# EAGLE board rev0.1 (EAGLE 8.3.1)
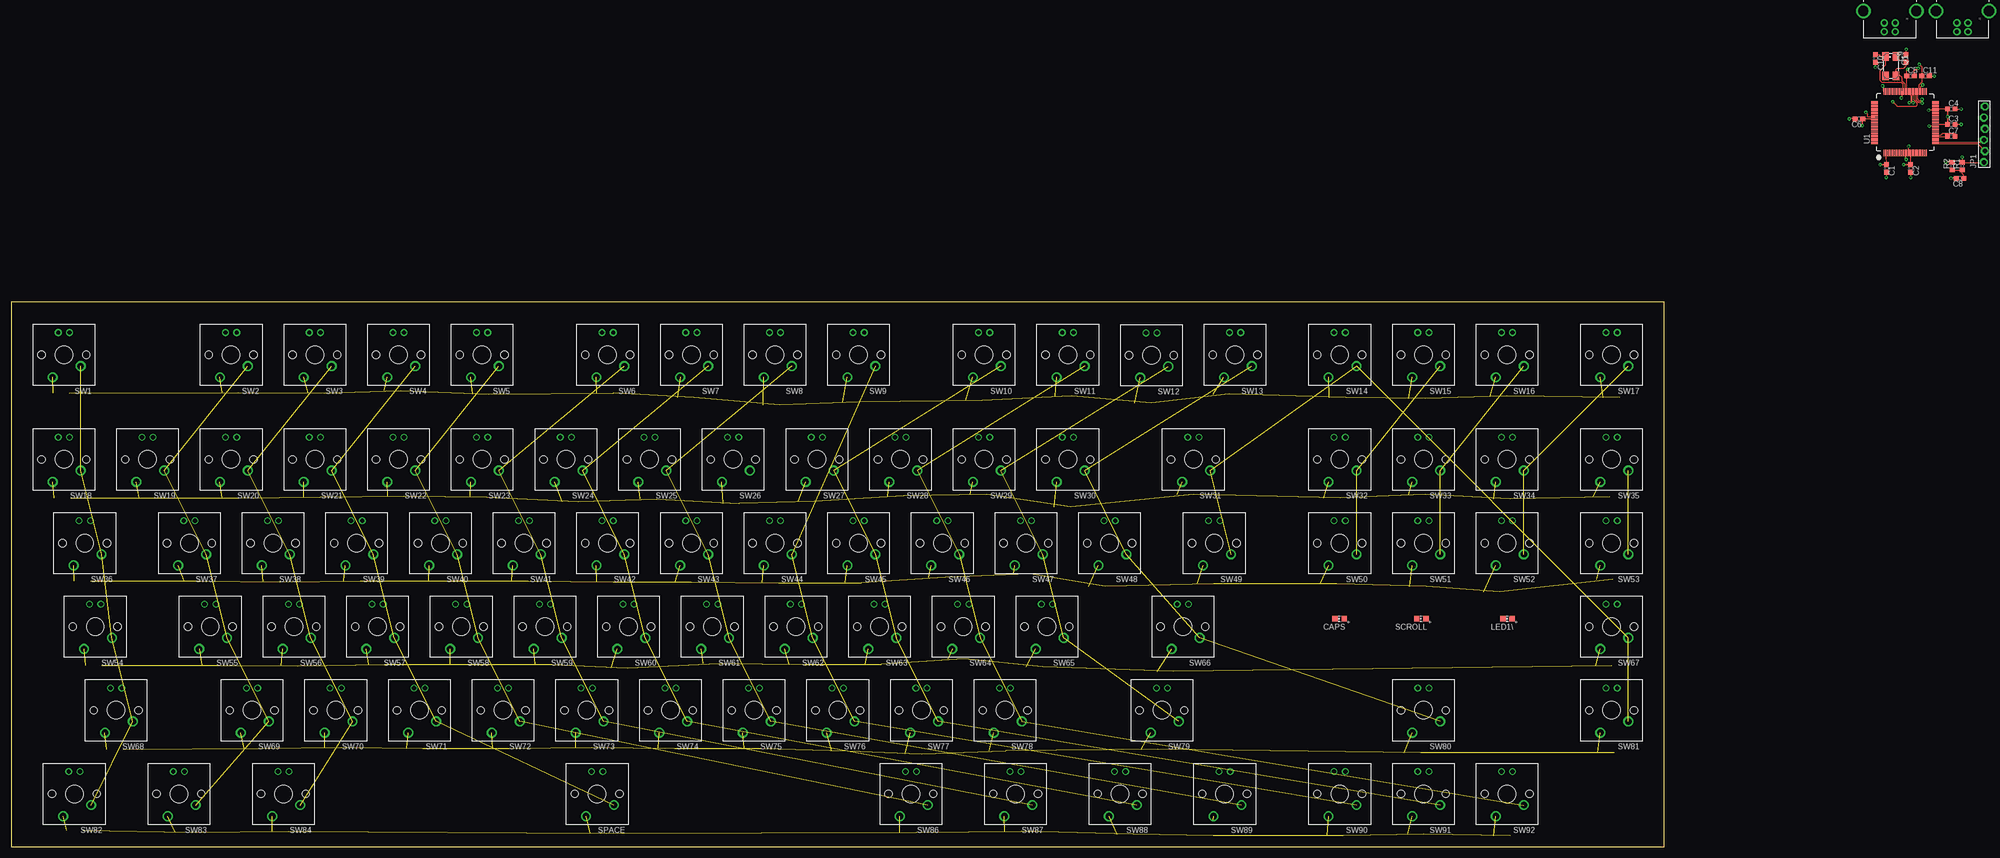
[diagram p0: board, top side]
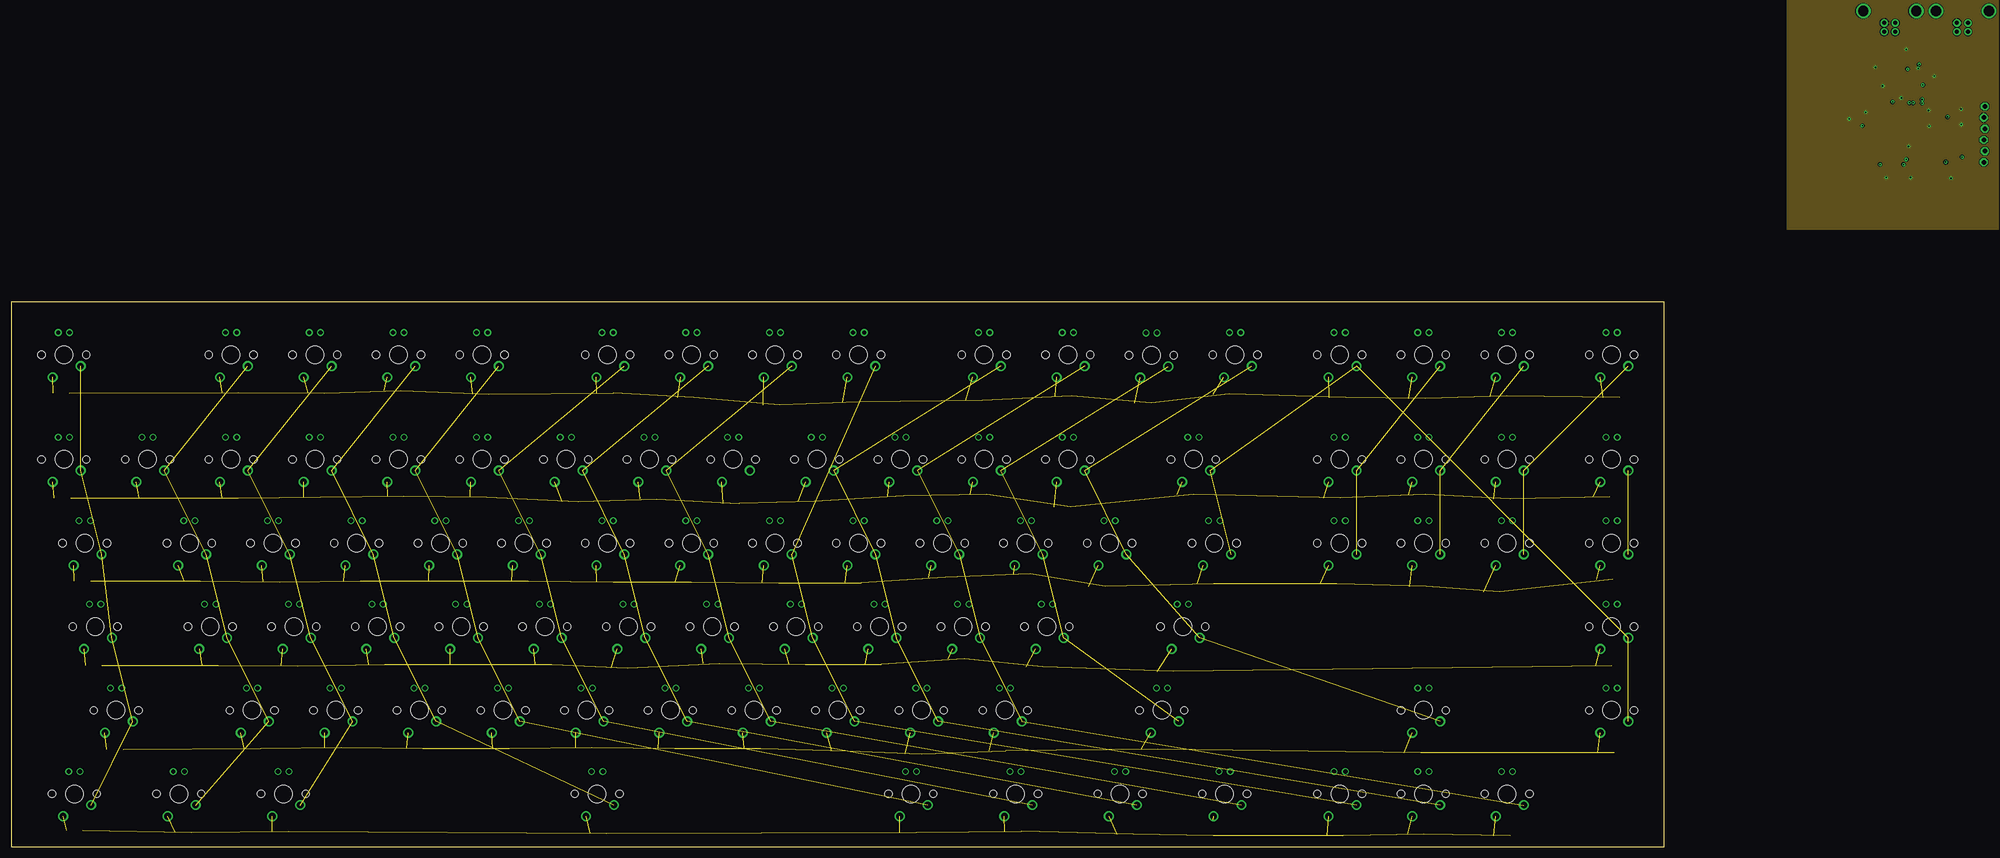
[diagram p1: board, inner layer GND]
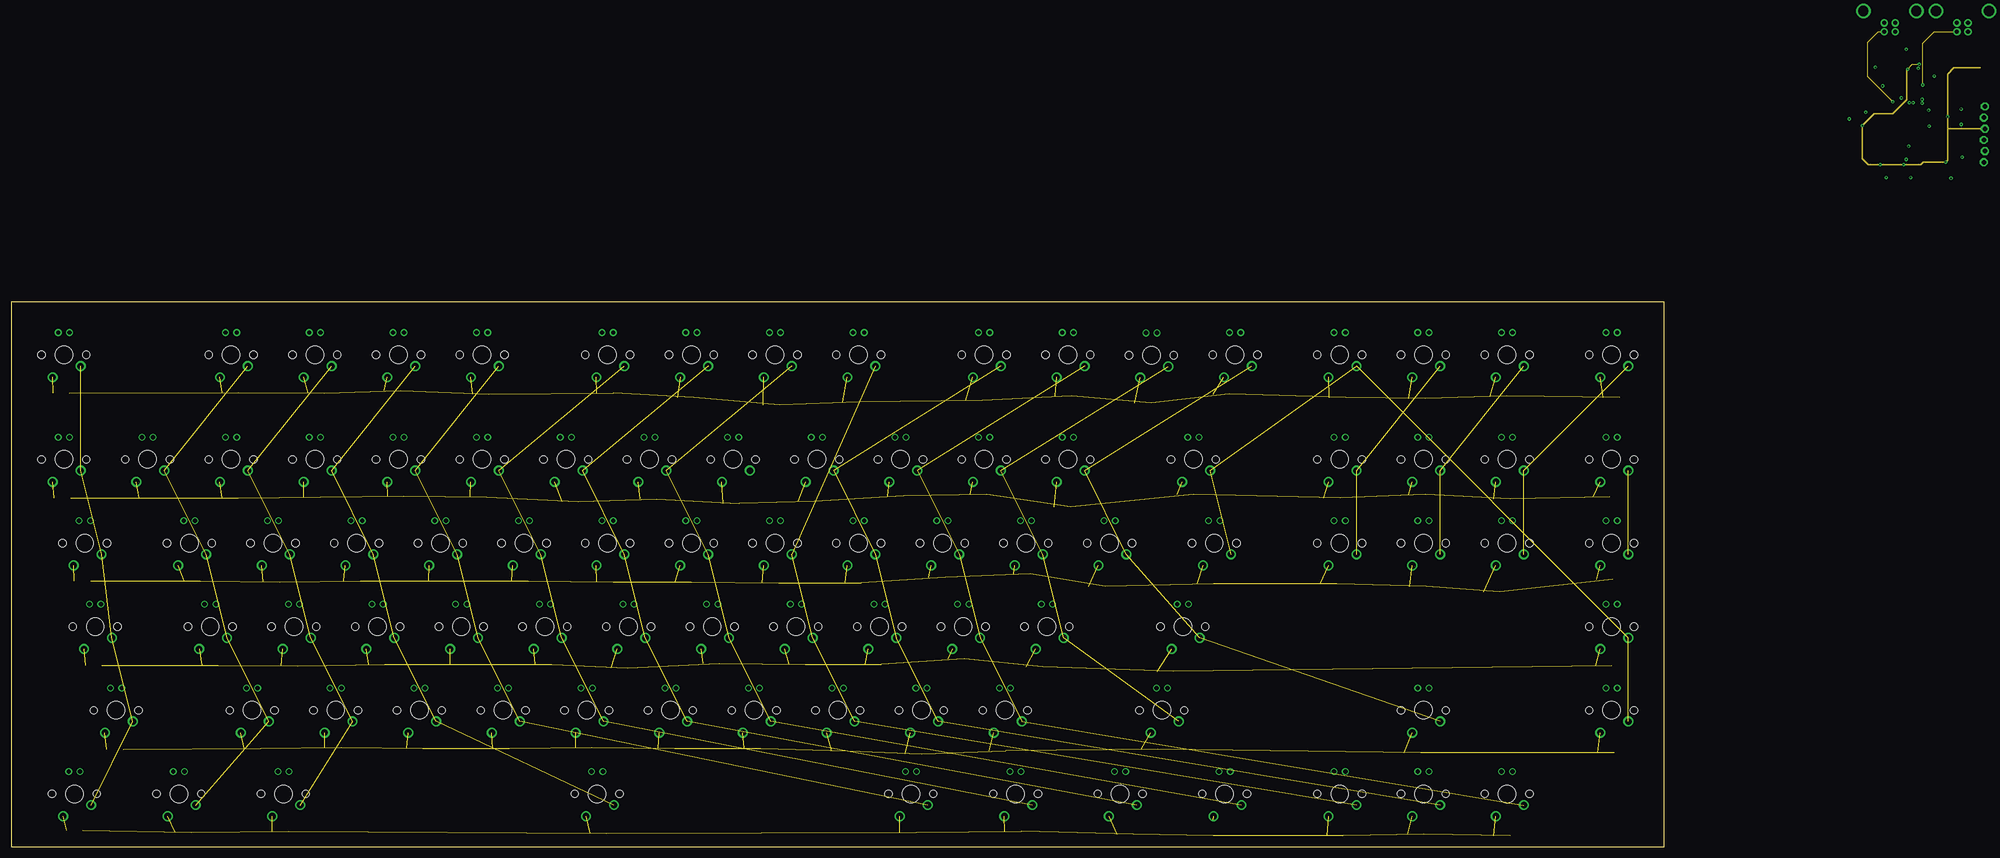
[diagram p2: board, inner layer SUPPLY]
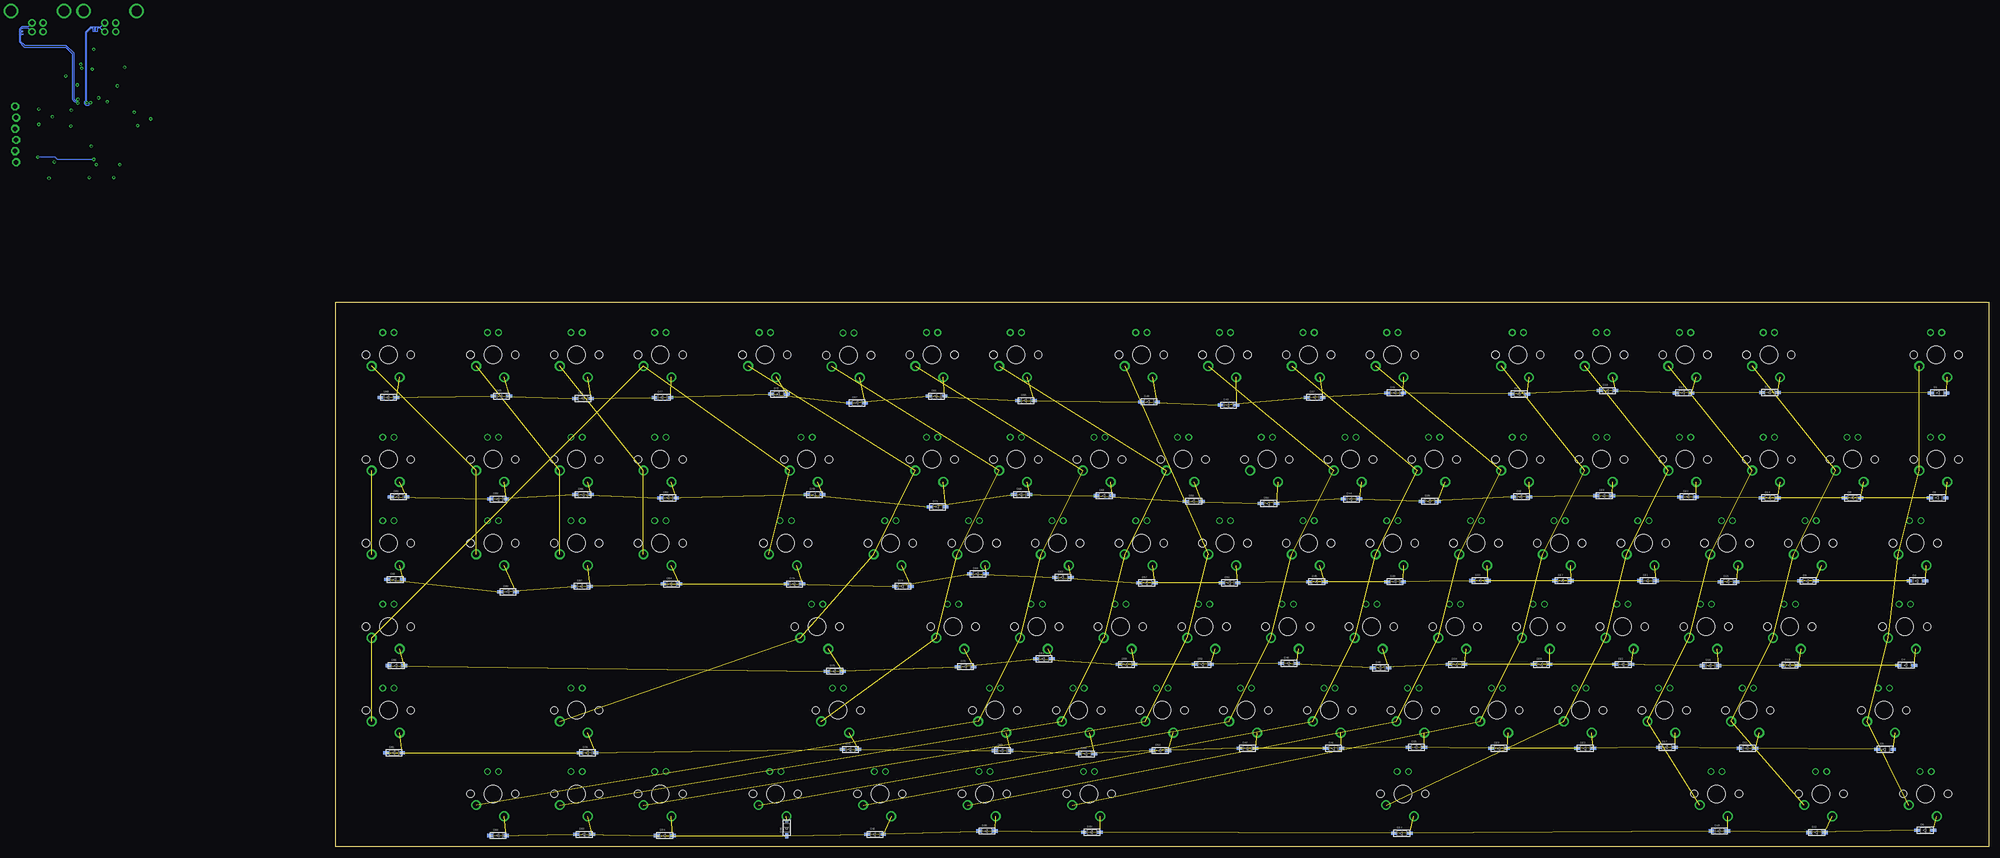
[diagram p3: board, bottom side, seen from below]

Size 375.5 x 123.75 mm. Coordinates in mm from the lower left corner, seen from the top.
Outline: 0,0 375.5,0 375.5,123.75 0,123.75 0,0
Copper layers (1*2*15*16): TOP 0.035mm / dielectric 0.33mm / GND 0.035mm / dielectric 0.8mm / SUPPLY 0.035mm / dielectric 0.33mm / BOTTOM 0.035mm
Design rules "alleybeachdrc4layer *": minimum track width 6mil, minimum drill 0.3mm, track to track 6mil, track to pad 6mil, pad to pad 6mil, via to via 6mil, smd to smd 6mil, copper to edge 10mil, drill to drill 0.3mm, minimum pad ring 10mil, minimum via ring 8mil, stop-mask expansion 5mil, vias tented up to drill 0.3mm, thermal gap 10mil

## Footprints (pad centres in the part's own frame; a part is rotated, then mirrored left to right if it is on the bottom)
C0603 = smd 1.1 x 1: 1 -0.85,0; 2 0.85,0
CHIP-LED0805 = smd 1.2 x 1.2: A 0,-1.05; C 0,1.05
SOD-123 = smd 1.2 x 0.7: A 1.85,0; C -1.85,0
USB-B-PTH = drill 0.914 pad 1.676: D+ 0,1.25; D- 1.981,1.25; GND 0,-1.25; VBUS 1.981,-1.25 | drill 2.286: S1 -2.718,-6.02; S2 -2.718,6.02
1X06-BIGLOCK = drill 1.016 pad 1.778 octagon: 1 -6.35,0.127; 2 -3.81,-0.127; 3 -1.27,0.127; 4 1.27,-0.127; 5 3.81,0.127; 6 6.35,-0.127
CTS406 = smd 1.9 x 1.4: 1 -2.2,-1.2; 2 2.2,-1.2; 3 2.2,1.2; 4 -2.2,1.2
R0603 = smd 1 x 1.1: 1 -0.85,0; 2 0.85,0
CHERRY_MX = drill 1.5: 1 -3.81,2.54; 2 2.54,5.08 | drill 1: A -1.27,-5.08; K 1.27,-5.08 | hole 4: 0,0 | hole 1.7: 5.08,0; -5.08,0
PIC32MK1024MCF100 = smd 1.5 x 0.2: 1 -6.95,4.8; 2 -6.95,4.4; 3 -6.95,4; 4 -6.95,3.6; 5 -6.95,3.2; 6 -6.95,2.8; 7 -6.95,2.4; 8 -6.95,2; 9 -6.95,1.6; 10 -6.95,1.2; 11 -6.95,0.8; 12 -6.95,0.4; 13 -6.95,0; 14 -6.95,-0.4; 15 -6.95,-0.8; 16 -6.95,-1.2; 17 -6.95,-1.6; 18 -6.95,-2; 19 -6.95,-2.4; 20 -6.95,-2.8; 21 -6.95,-3.2; 22 -6.95,-3.6; 23 -6.95,-4; 24 -6.95,-4.4; 25 -6.95,-4.8; 51 6.95,-4.8; 52 6.95,-4.4; 53 6.95,-4; 54 6.95,-3.6; 55 6.95,-3.2; 56 6.95,-2.8; 57 6.95,-2.4; 58 6.95,-2; 59 6.95,-1.6; 60 6.95,-1.2; 61 6.95,-0.8; 62 6.95,-0.4; 63 6.95,0; 64 6.95,0.4; 65 6.95,0.8; 66 6.95,1.2; 67 6.95,1.6; 68 6.95,2; 69 6.95,2.4; 70 6.95,2.8; 71 6.95,3.2; 72 6.95,3.6; 73 6.95,4; 74 6.95,4.4; 75 6.95,4.8 | smd 0.2 x 1.5: 26 -4.9,-6.95; 27 -4.5,-6.95; 28 -4.1,-6.95; 29 -3.7,-6.95; 30 -3.3,-6.95; 31 -2.9,-6.95; 32 -2.5,-6.95; 33 -2.1,-6.95; 34 -1.7,-6.95; 35 -1.3,-6.95; 36 -0.9,-6.95; 37 -0.5,-6.95; 38 -0.1,-6.95; 39 0.3,-6.95; 40 0.7,-6.95; 41 1.1,-6.95; 42 1.5,-6.95; 43 1.9,-6.95; 44 2.3,-6.95; 45 2.7,-6.95; 46 3.1,-6.95; 47 3.5,-6.95; 48 3.9,-6.95; 49 4.3,-6.95; 50 4.7,-6.95; 76 4.7,6.95; 77 4.3,6.95; 78 3.9,6.95; 79 3.5,6.95; 80 3.1,6.95; 81 2.7,6.95; 82 2.3,6.95; 83 1.9,6.95; 84 1.5,6.95; 85 1.1,6.95; 86 0.7,6.95; 87 0.3,6.95; 88 -0.1,6.95; 89 -0.5,6.95; 90 -0.9,6.95; 91 -1.3,6.95; 92 -1.7,6.95; 93 -2.1,6.95; 94 -2.5,6.95; 95 -2.9,6.95; 96 -3.3,6.95; 97 -3.7,6.95; 98 -4.1,6.95; 99 -4.5,6.95; 100 -4.9,6.95

## Placement (x,y rotation side)
C1  0.1uF  [C0603]  425.89,154.12 270 top  (outside the outline)
C2  0.1uF  [C0603]  431.39,154.12 270 top  (outside the outline)
C3  0.1uF  [C0603]  440.64,164.12 0 top  (outside the outline)
C4  0.1uF  [C0603]  440.64,167.62 0 top  (outside the outline)
C5  0.1uF  [C0603]  431.39,175.12 0 top  (outside the outline)
C6  0.1uF  [C0603]  419.64,165.37 180 top  (outside the outline)
C7  0.1uF  [C0603]  440.64,161.37 0 top  (outside the outline)
C8  0.1uF  [C0603]  442.64,151.87 180 top  (outside the outline)
C9  0.1uF  [C0603]  430.39,179.12 90 top  (outside the outline)
C10  0.1uF  [C0603]  423.39,179.12 270 top  (outside the outline)
C11  0.1uF  [C0603]  434.8,175.11 0 top  (outside the outline)
CAPS  [CHIP-LED0805]  301.75,51.82 90 top
D1  [SOD-123]  11.43,103.12 0 bottom
D2  [SOD-123]  11.67,79.26 0 bottom
D3  [SOD-123]  16.25,60.38 0 bottom
D4  [SOD-123]  18.79,41.24 0 bottom
D5  [SOD-123]  23.61,22.11 0 bottom
D6  [SOD-123]  14.47,3.73 0 bottom
D7  [SOD-123]  49.77,103.22 0 bottom
D8  [SOD-123]  30.98,79.26 0 bottom
D9  [SOD-123]  41.14,60.38 0 bottom
D10  [SOD-123]  45.2,41.24 0 bottom
D11  [SOD-123]  54.85,22.36 0 bottom
D12  [SOD-123]  39.11,3.23 0 bottom
D13  [SOD-123]  69.34,103.12 0 bottom
D14  [SOD-123]  49.78,79.25 0 bottom
D15  [SOD-123]  59.18,60.2 0 bottom
D16  [SOD-123]  63.25,41.15 0 bottom
D17  [SOD-123]  73.15,22.61 0 bottom
D18  [SOD-123]  61.21,3.56 0 bottom
D19  [SOD-123]  86.61,103.63 0 bottom
D20  [SOD-123]  68.33,79.5 0 bottom
D21  [SOD-123]  77.47,60.45 0 bottom
D22  [SOD-123]  83.06,41.4 0 bottom
D23  [SOD-123]  91.69,22.35 0 bottom
D24  [SOD-123]  133.35,3.05 0 bottom
D25  [SOD-123]  106.68,102.87 0 bottom
D26  [SOD-123]  87.38,79.76 0 bottom
D27  [SOD-123]  96.77,60.45 0 bottom
D28  [SOD-123]  101.6,41.4 0 bottom
D29  [SOD-123]  111.25,22.35 0 bottom
D30  [SOD-123]  203.71,3.3 0 bottom
D31  [SOD-123]  134.87,103.12 0 bottom
D32  [SOD-123]  106.17,79.5 0 bottom
D33  [SOD-123]  115.57,60.45 0 bottom
D34  [SOD-123]  120.9,41.4 0 bottom
D35  [SOD-123]  130.05,22.61 0 bottom
D36  [SOD-123]  227.58,3.56 0 bottom
D37  [SOD-123]  153.16,102.11 0 bottom
D38  [SOD-123]  127,78.49 0 bottom
D39  [SOD-123]  134.87,60.2 0 bottom
D40  [SOD-123]  138.18,40.64 0 bottom
D41  [SOD-123]  148.84,22.35 0 bottom
D42  [SOD-123]  252.98,2.79 0 bottom
D43  [SOD-123]  172.72,100.33 0 bottom
D44  [SOD-123]  144.78,78.99 0 bottom
D45  [SOD-123]  152.65,60.2 0 bottom
D46  [SOD-123]  159,41.66 0 bottom
D47  [SOD-123]  168.4,22.35 0 bottom
D48  [SOD-123]  273.05,4.32 90 bottom
D49  [SOD-123]  190.75,101.09 0 bottom
D50  [SOD-123]  163.58,77.98 0 bottom
D51  [SOD-123]  172.47,59.94 0 bottom
D52  [SOD-123]  178.56,41.4 0 bottom
D53  [SOD-123]  188.21,21.84 0 bottom
D54  [SOD-123]  300.74,2.54 0 bottom
D55  [SOD-123]  218.69,101.35 0 bottom
D56  [SOD-123]  180.59,78.49 0 bottom
D57  [SOD-123]  191.26,59.94 0 bottom
D58  [SOD-123]  195.83,41.4 0 bottom
D59  [SOD-123]  204.98,21.08 0 bottom
D60  [SOD-123]  319.02,2.79 0 bottom
D61  [SOD-123]  239.01,102.36 0 bottom
D62  [SOD-123]  200.91,79.76 0 bottom
D63  [SOD-123]  210.31,61.21 0 bottom
D64  [SOD-123]  214.63,42.67 0 bottom
D65  [SOD-123]  224.03,21.84 0 bottom
D66  [SOD-123]  338.58,2.54 0 bottom
D67  [SOD-123]  257.05,100.84 0 bottom
D68  [SOD-123]  219.71,80.01 0 bottom
D69  [SOD-123]  229.62,61.98 0 bottom
D70  [SOD-123]  232.41,40.89 0 bottom
D71  [SOD-123]  258.57,22.1 0 bottom
D72  [SOD-123]  274.83,102.87 0 bottom
D73  [SOD-123]  238.76,77.22 0 bottom
D74  [SOD-123]  246.63,59.18 0 bottom
D75  [SOD-123]  262.13,39.88 0 bottom
D76  [SOD-123]  318.26,21.34 0 bottom
D77  [SOD-123]  301.24,102.11 0 bottom
D78  [SOD-123]  266.7,80.01 0 bottom
D79  [SOD-123]  271.27,59.69 0 bottom
D80  [SOD-123]  361.7,41.15 0 bottom
D81  [SOD-123]  362.2,21.34 0 bottom
D82  [SOD-123]  319.28,101.85 0 bottom
D83  [SOD-123]  299.97,79.25 0 bottom
D84  [SOD-123]  299.21,59.69 0 bottom
D85  [SOD-123]  337.82,102.36 0 bottom
D86  [SOD-123]  319.28,80.01 0 bottom
D87  [SOD-123]  319.53,59.18 0 bottom
D88  [SOD-123]  363.47,102.11 0 bottom
D89  [SOD-123]  338.58,78.99 0 bottom
D90  [SOD-123]  336.3,57.91 0 bottom
D91  [SOD-123]  361.19,79.5 0 bottom
D92  [SOD-123]  361.95,60.71 0 bottom
J1  USB-B  [USB-B-PTH]  443.18,187.18 270 top  (outside the outline)
J2  USB-B  [USB-B-PTH]  426.67,187.18 270 top  (outside the outline)
JP1  [1X06-BIGLOCK]  448.14,161.87 90 top  (outside the outline)
LED1\  [CHIP-LED0805]  339.85,51.82 90 top
Q1  [CTS406]  426.89,177.37 270 top  (outside the outline)
R1  1K  [R0603]  443.14,154.62 90 top  (outside the outline)
R2  10K  [R0603]  440.89,154.62 90 top  (outside the outline)
SCROLL  [CHIP-LED0805]  320.29,51.82 90 top
SPACE  CHERRY_MX  [CHERRY_MX]  133.12,12 180 top
SW1  CHERRY_MX  [CHERRY_MX]  12,111.75 180 top
SW2  CHERRY_MX  [CHERRY_MX]  50,111.75 180 top
SW3  CHERRY_MX  [CHERRY_MX]  69,111.75 180 top
SW4  CHERRY_MX  [CHERRY_MX]  88,111.75 180 top
SW5  CHERRY_MX  [CHERRY_MX]  107,111.75 180 top
SW6  CHERRY_MX  [CHERRY_MX]  135.5,111.75 180 top
SW7  CHERRY_MX  [CHERRY_MX]  154.5,111.75 180 top
SW8  CHERRY_MX  [CHERRY_MX]  173.5,111.75 180 top
SW9  CHERRY_MX  [CHERRY_MX]  192.5,111.75 180 top
SW10  CHERRY_MX  [CHERRY_MX]  221,111.75 180 top
SW11  CHERRY_MX  [CHERRY_MX]  240,111.75 180 top
SW12  CHERRY_MX  [CHERRY_MX]  259,111.65 180 top
SW13  CHERRY_MX  [CHERRY_MX]  278,111.75 180 top
SW14  CHERRY_MX  [CHERRY_MX]  301.75,111.75 180 top
SW15  CHERRY_MX  [CHERRY_MX]  320.75,111.75 180 top
SW16  CHERRY_MX  [CHERRY_MX]  339.75,111.75 180 top
SW17  CHERRY_MX  [CHERRY_MX]  363.5,111.75 180 top
SW18  CHERRY_MX  [CHERRY_MX]  12,88 180 top
SW19  CHERRY_MX  [CHERRY_MX]  31,88 180 top
SW20  CHERRY_MX  [CHERRY_MX]  50,88 180 top
SW21  CHERRY_MX  [CHERRY_MX]  69,88 180 top
SW22  CHERRY_MX  [CHERRY_MX]  88,88 180 top
SW23  CHERRY_MX  [CHERRY_MX]  107,88 180 top
SW24  CHERRY_MX  [CHERRY_MX]  126,88 180 top
SW25  CHERRY_MX  [CHERRY_MX]  145,88 180 top
SW26  CHERRY_MX  [CHERRY_MX]  164,88 180 top
SW27  CHERRY_MX  [CHERRY_MX]  183,88 180 top
SW28  CHERRY_MX  [CHERRY_MX]  202,88 180 top
SW29  CHERRY_MX  [CHERRY_MX]  221,88 180 top
SW30  CHERRY_MX  [CHERRY_MX]  240,88 180 top
SW31  CHERRY_MX  [CHERRY_MX]  268.5,88 180 top
SW32  CHERRY_MX  [CHERRY_MX]  301.75,88 180 top
SW33  CHERRY_MX  [CHERRY_MX]  320.75,88 180 top
SW34  CHERRY_MX  [CHERRY_MX]  339.75,88 180 top
SW35  CHERRY_MX  [CHERRY_MX]  363.5,88 180 top
SW36  CHERRY_MX  [CHERRY_MX]  16.75,69 180 top
SW37  CHERRY_MX  [CHERRY_MX]  40.5,69 180 top
SW38  CHERRY_MX  [CHERRY_MX]  59.5,69 180 top
SW39  CHERRY_MX  [CHERRY_MX]  78.5,69 180 top
SW40  CHERRY_MX  [CHERRY_MX]  97.5,69 180 top
SW41  CHERRY_MX  [CHERRY_MX]  116.5,69 180 top
SW42  CHERRY_MX  [CHERRY_MX]  135.5,69 180 top
SW43  CHERRY_MX  [CHERRY_MX]  154.5,69 180 top
SW44  CHERRY_MX  [CHERRY_MX]  173.5,69 180 top
SW45  CHERRY_MX  [CHERRY_MX]  192.5,69 180 top
SW46  CHERRY_MX  [CHERRY_MX]  211.5,69 180 top
SW47  CHERRY_MX  [CHERRY_MX]  230.5,69 180 top
SW48  CHERRY_MX  [CHERRY_MX]  249.5,69 180 top
SW49  CHERRY_MX  [CHERRY_MX]  273.25,69 180 top
SW50  CHERRY_MX  [CHERRY_MX]  301.75,69 180 top
SW51  CHERRY_MX  [CHERRY_MX]  320.75,69 180 top
SW52  CHERRY_MX  [CHERRY_MX]  339.75,69 180 top
SW53  CHERRY_MX  [CHERRY_MX]  363.5,69 180 top
SW54  CHERRY_MX  [CHERRY_MX]  19.12,50 180 top
SW55  CHERRY_MX  [CHERRY_MX]  45.25,50 180 top
SW56  CHERRY_MX  [CHERRY_MX]  64.25,50 180 top
SW57  CHERRY_MX  [CHERRY_MX]  83.25,50 180 top
SW58  CHERRY_MX  [CHERRY_MX]  102.25,50 180 top
SW59  CHERRY_MX  [CHERRY_MX]  121.25,50 180 top
SW60  CHERRY_MX  [CHERRY_MX]  140.25,50 180 top
SW61  CHERRY_MX  [CHERRY_MX]  159.25,50 180 top
SW62  CHERRY_MX  [CHERRY_MX]  178.25,50 180 top
SW63  CHERRY_MX  [CHERRY_MX]  197.25,50 180 top
SW64  CHERRY_MX  [CHERRY_MX]  216.25,50 180 top
SW65  CHERRY_MX  [CHERRY_MX]  235.25,50 180 top
SW66  CHERRY_MX  [CHERRY_MX]  266.12,50 180 top
SW67  CHERRY_MX  [CHERRY_MX]  363.5,50 180 top
SW68  CHERRY_MX  [CHERRY_MX]  23.88,31 180 top
SW69  CHERRY_MX  [CHERRY_MX]  54.75,31 180 top
SW70  CHERRY_MX  [CHERRY_MX]  73.75,31 180 top
SW71  CHERRY_MX  [CHERRY_MX]  92.75,31 180 top
SW72  CHERRY_MX  [CHERRY_MX]  111.75,31 180 top
SW73  CHERRY_MX  [CHERRY_MX]  130.75,31 180 top
SW74  CHERRY_MX  [CHERRY_MX]  149.75,31 180 top
SW75  CHERRY_MX  [CHERRY_MX]  168.75,31 180 top
SW76  CHERRY_MX  [CHERRY_MX]  187.75,31 180 top
SW77  CHERRY_MX  [CHERRY_MX]  206.75,31 180 top
SW78  CHERRY_MX  [CHERRY_MX]  225.75,31 180 top
SW79  CHERRY_MX  [CHERRY_MX]  261.38,31 180 top
SW80  CHERRY_MX  [CHERRY_MX]  320.75,31 180 top
SW81  CHERRY_MX  [CHERRY_MX]  363.5,31 180 top
SW82  CHERRY_MX  [CHERRY_MX]  14.38,12 180 top
SW83  CHERRY_MX  [CHERRY_MX]  38.12,12 180 top
SW84  CHERRY_MX  [CHERRY_MX]  61.88,12 180 top
SW86  CHERRY_MX  [CHERRY_MX]  204.38,12 180 top
SW87  CHERRY_MX  [CHERRY_MX]  228.12,12 180 top
SW88  CHERRY_MX  [CHERRY_MX]  251.88,12 180 top
SW89  CHERRY_MX  [CHERRY_MX]  275.62,12 180 top
SW90  CHERRY_MX  [CHERRY_MX]  301.75,12 180 top
SW91  CHERRY_MX  [CHERRY_MX]  320.75,12 180 top
SW92  CHERRY_MX  [CHERRY_MX]  339.75,12 180 top
U1  PIC32MK1024MCF100100TQFP  [PIC32MK1024MCF100]  430.14,164.62 90 top  (outside the outline)

## Library data of the parts
C1-C11 R1 R2 = resistor
CAPS D1-D92 JP1 LED1\ SCROLL = adafruit
J1 J2 = SparkFun-Connectors; PROD_ID: CONN-08278
Q1 = adafruit; OC_FARNELL: unknown; OC_NEWARK: unknown
SPACE SW1-SW84 SW86-SW92 = ALLEYBEACH_LIB
U1 = clackboard_lib

## Nets
C1: SW1.1 SW18.1 SW36.1 SW54.1 SW68.1 SW82.1
C2: SW2.1 SW19.1 SW37.1 SW55.1 SW69.1 SW83.1
C3: SW3.1 SW20.1 SW38.1 SW56.1 SW70.1 SW84.1
C4: SPACE.1 SW4.1 SW21.1 SW39.1 SW57.1 SW71.1
C5: SW5.1 SW22.1 SW40.1 SW58.1 SW72.1 SW86.1
C6: SW6.1 SW23.1 SW41.1 SW59.1 SW73.1 SW87.1
GND: C1.2 C2.2 C3.2 C4.2 C5.2 C6.2 C8.2 C9.2 C10.2 C11.2 J1.GND J2.GND JP1.5 U1.15 U1.36 U1.45 U1.65 U1.75 U1.85
MCLR: JP1.1 R1.2 U1.13
N$1: C7.1 U1.30
N$2: C7.2 U1.31
N$3: C8.1 R1.1 R2.1
N$4: C9.1 Q1.3 U1.63
N$5: C10.1 Q1.1 U1.64
N$6: D88.A SW17.2
N$7: D6.A SW82.2
N$8: D5.A SW68.2
N$9: D4.A SW54.2
N$10: D3.A SW36.2
N$11: D2.A SW18.2
N$12: D1.A SW1.2
N$13: D91.A SW35.2
N$14: D7.A SW2.2
N$15: D12.A SW83.2
N$16: D11.A SW69.2
N$17: D10.A SW55.2
N$18: D9.A SW37.2
N$19: D8.A SW19.2
N$20: D92.A SW53.2
N$21: D90.A SW52.2
N$22: D89.A SW34.2
N$23: D85.A SW16.2
N$24: SW7.1 SW24.1 SW42.1 SW60.1 SW74.1 SW88.1
N$25: SW8.1 SW25.1 SW43.1 SW61.1 SW75.1 SW89.1
N$26: SW9.1 SW44.1 SW62.1 SW76.1 SW90.1
N$27: SW10.1 SW27.1 SW45.1 SW63.1 SW77.1 SW91.1
N$28: SW11.1 SW28.1 SW46.1 SW64.1 SW78.1 SW92.1
N$29: SW12.1 SW29.1 SW47.1 SW65.1 SW79.1
N$30: SW13.1 SW30.1 SW48.1 SW66.1 SW80.1
N$31: SW14.1 SW31.1 SW49.1 SW67.1 SW81.1
N$32: SW15.1 SW32.1 SW50.1
N$33: SW16.1 SW33.1 SW51.1
N$34: SW17.1 SW34.1 SW52.1
N$35: SW35.1 SW53.1
N$36: D14.A SW20.2
N$37: D13.A SW3.2
N$38: D15.A SW38.2
N$39: D21.A SW39.2
N$40: D20.A SW21.2
N$41: D22.A SW57.2
N$42: D16.A SW56.2
N$43: D17.A SW70.2
N$44: D23.A SW71.2
N$45: D24.A SPACE.2
N$46: D18.A SW84.2
N$47: D19.A SW4.2
N$48: D25.A SW5.2
N$49: D31.A SW6.2
N$50: D26.A SW22.2
N$51: D32.A SW23.2
N$52: D33.A SW41.2
N$53: D27.A SW40.2
N$54: D28.A SW58.2
N$55: D34.A SW59.2
N$56: D35.A SW73.2
N$57: D29.A SW72.2
N$58: D30.A SW86.2
N$59: D36.A SW87.2
N$60: D86.A SW33.2
N$61: D87.A SW51.2
N$62: D84.A SW50.2
N$63: D83.A SW32.2
N$64: D82.A SW15.2
N$65: D77.A SW14.2
N$66: D78.A SW31.2
N$67: D79.A SW49.2
N$68: D80.A SW67.2
N$69: D81.A SW81.2
N$70: D76.A SW80.2
N$71: D75.A SW66.2
N$72: D70.A SW65.2
N$73: D71.A SW79.2
N$74: D69.A SW47.2
N$75: D74.A SW48.2
N$76: D73.A SW30.2
N$77: D68.A SW29.2
N$78: D67.A SW12.2
N$79: D72.A SW13.2
N$80: D61.A SW11.2
N$81: D55.A SW10.2
N$82: D56.A SW27.2
N$83: D62.A SW28.2
N$84: D63.A SW46.2
N$85: D57.A SW45.2
N$86: D58.A SW63.2
N$87: D64.A SW64.2
N$88: D65.A SW78.2
N$89: D59.A SW77.2
N$90: D60.A SW91.2
N$91: D66.A SW92.2
N$92: D48.A SW89.2
N$93: D54.A SW90.2
N$94: D47.A SW75.2
N$95: D53.A SW76.2
N$96: D52.A SW62.2
N$97: D46.A SW61.2
N$98: D45.A SW43.2
N$99: D51.A SW44.2
N$100: D50.A SW26.2
N$101: D44.A SW25.2
N$102: D43.A SW8.2
N$103: D49.A SW9.2
N$104: D37.A SW7.2
N$105: D38.A SW24.2
N$106: D39.A SW42.2
N$107: D40.A SW60.2
N$108: D41.A SW74.2
N$109: D42.A SW88.2
PGEC1: JP1.2 U1.26
PGED1: JP1.3 U1.27
R1: D1.C D7.C D13.C D19.C D25.C D31.C D37.C D43.C D49.C D55.C D61.C D67.C D72.C D77.C D82.C D85.C D88.C
R2: D2.C D8.C D14.C D20.C D26.C D32.C D38.C D44.C D50.C D56.C D62.C D68.C D73.C D78.C D83.C D86.C D89.C D91.C
R3: D3.C D9.C D15.C D21.C D27.C D33.C D39.C D45.C D51.C D57.C D63.C D69.C D74.C D79.C D84.C D87.C D90.C D92.C
R4: D4.C D10.C D16.C D22.C D28.C D34.C D40.C D46.C D52.C D58.C D64.C D70.C D75.C D80.C
R5: D5.C D11.C D17.C D23.C D29.C D35.C D41.C D47.C D53.C D59.C D65.C D71.C D76.C D81.C
R6: D6.C D12.C D18.C D24.C D30.C D36.C D42.C D48.C D54.C D60.C D66.C
USB1_N: J1.D- U1.56
USB1_P: J1.D+ U1.57
USB2_N: J2.D- U1.59
USB2_P: J2.D+ U1.60
VBUS1: J1.VBUS U1.54
VBUS2: J2.VBUS U1.58
VCC3V3: C1.1 C2.1 C3.1 C4.1 C5.1 C6.1 C11.1 JP1.4 R2.2 U1.2 U1.16 U1.37 U1.46 U1.55 U1.62 U1.86

## Tracks (layer width: path | path; a pad name or v marks a point on that pad's centre or on a via)
C1  (5 unrouted)
C2  (5 unrouted)
C3  (5 unrouted)
C4  (5 unrouted)
C5  (5 unrouted)
C6  (5 unrouted)
GND  (via drill 0.3)
  TOP 0.152: C6.2 417.46,165.37 v417.45,165.36 | U1.85 421.78,165.72 421.64,165.87 421.64,166.45 v421.21,166.88 | U1.75 425.34,172.58 v425.04,172.88 | C10.2 v423.39,177.1 | U1.65 429.34,170.17 v429.31,170.14 | C5.2 432.24,176.4 432.51,176.66 432.92,176.66 v433.12,176.87 | C11.2 v436.78,175.11 | C3.2 v442.89,164.12 v442.9,164.12 | C4.2 v442.87,167.62 | C9.2 430.39,181.17 v430.4,181.19 | C1.2 425.89,152.06 v425.88,152.05 | C2.2 v431.39,152.05 | U1.15 v430.94,159.16 | U1.45 v435.49,167.32 v435.48,167.32 | U1.36 435.62,163.72 v435.61,163.71 | C8.2 v440.56,151.87
  pour GND: 451.28,200.06 451.28,140.27 403.38,140.27 403.38,200.06
MCLR  (via drill 0.3)
  TOP 0.152: JP1.1 447.96,155.47 R1.2 443.14,156.66 v443.1,156.7 | U1.13 430.14,156.45 v430.43,156.17
  BOTTOM 0.152: v430.43,156.17 438.61,156.17 439.14,156.7 v443.1,156.7
N$1
  TOP 0.152: U1.30 439.74,161.32 C7.1
N$2
  TOP 0.152: U1.31 438.3,161.72 438.73,162.16 441.27,162.16 441.49,161.94 C7.2
N$3
  TOP 0.152: C8.1 443.49,152.58 443.18,152.89 443.18,153.74 R1.1 R2.1
N$4
  TOP 0.152: U1.63 430.14,173.29 429.46,173.97 429.46,174.73 429.02,175.17 Q1.3 428.09,176.66 428.32,176.89 429.84,176.89 430.39,177.44 C9.1
N$5
  TOP 0.152: U1.64 429.74,173.26 429.37,173.63 424.98,173.63 424.51,174.1 424.51,176.38 425.69,177.57 425.69,179.54 | 425.69,179.54 Q1.1 | C10.1 424.22,179.97 424.64,179.56 425.68,179.56 425.69,179.54
N$6  (1 unrouted)
N$7  (1 unrouted)
N$8  (1 unrouted)
N$9  (1 unrouted)
N$10  (1 unrouted)
N$11  (1 unrouted)
N$12  (1 unrouted)
N$13  (1 unrouted)
N$14  (1 unrouted)
N$15  (1 unrouted)
N$16  (1 unrouted)
N$17  (1 unrouted)
N$18  (1 unrouted)
N$19  (1 unrouted)
N$20  (1 unrouted)
N$21  (1 unrouted)
N$22  (1 unrouted)
N$23  (1 unrouted)
N$24  (5 unrouted)
N$25  (5 unrouted)
N$26  (4 unrouted)
N$27  (5 unrouted)
N$28  (5 unrouted)
N$29  (4 unrouted)
N$30  (4 unrouted)
N$31  (4 unrouted)
N$32  (2 unrouted)
N$33  (2 unrouted)
N$34  (2 unrouted)
N$35  (1 unrouted)
N$36  (1 unrouted)
N$37  (1 unrouted)
N$38  (1 unrouted)
N$39  (1 unrouted)
N$40  (1 unrouted)
N$41  (1 unrouted)
N$42  (1 unrouted)
N$43  (1 unrouted)
N$44  (1 unrouted)
N$45  (1 unrouted)
N$46  (1 unrouted)
N$47  (1 unrouted)
N$48  (1 unrouted)
N$49  (1 unrouted)
N$50  (1 unrouted)
N$51  (1 unrouted)
N$52  (1 unrouted)
N$53  (1 unrouted)
N$54  (1 unrouted)
N$55  (1 unrouted)
N$56  (1 unrouted)
N$57  (1 unrouted)
N$58  (1 unrouted)
N$59  (1 unrouted)
N$60  (1 unrouted)
N$61  (1 unrouted)
N$62  (1 unrouted)
N$63  (1 unrouted)
N$64  (1 unrouted)
N$65  (1 unrouted)
N$66  (1 unrouted)
N$67  (1 unrouted)
N$68  (1 unrouted)
N$69  (1 unrouted)
N$70  (1 unrouted)
N$71  (1 unrouted)
N$72  (1 unrouted)
N$73  (1 unrouted)
N$74  (1 unrouted)
N$75  (1 unrouted)
N$76  (1 unrouted)
N$77  (1 unrouted)
N$78  (1 unrouted)
N$79  (1 unrouted)
N$80  (1 unrouted)
N$81  (1 unrouted)
N$82  (1 unrouted)
N$83  (1 unrouted)
N$84  (1 unrouted)
N$85  (1 unrouted)
N$86  (1 unrouted)
N$87  (1 unrouted)
N$88  (1 unrouted)
N$89  (1 unrouted)
N$90  (1 unrouted)
N$91  (1 unrouted)
N$92  (1 unrouted)
N$93  (1 unrouted)
N$94  (1 unrouted)
N$95  (1 unrouted)
N$96  (1 unrouted)
N$97  (1 unrouted)
N$98  (1 unrouted)
N$99  (1 unrouted)
N$100  (1 unrouted)
N$101  (1 unrouted)
N$102  (1 unrouted)
N$103  (1 unrouted)
N$104  (1 unrouted)
N$105  (1 unrouted)
N$106  (1 unrouted)
N$107  (1 unrouted)
N$108  (1 unrouted)
N$109  (1 unrouted)
PGEC1
  TOP 0.152: U1.26 446.61,159.72 JP1.2
PGED1
  TOP 0.152: U1.27 447.53,160.12 JP1.3
R1  (16 unrouted)
R2  (17 unrouted)
R3  (17 unrouted)
R4  (13 unrouted)
R5  (13 unrouted)
R6  (10 unrouted)
USB1_N  (via drill 0.3)
  TOP 0.152: U1.56 432.94,170.67 432.89,170.62 432.89,169.92 433.29,169.53 434.01,169.53 v434.01,169.8
  BOTTOM 0.152: v434.01,169.8 434.01,169.53 434.58,169.53 434.87,169.82 434.87,180.26 436.64,182.02 446.01,182.02 447.06,183.08 447.06,184.31 arc90 446.91,184.46 446.71,184.46 arc-90 446.56,184.61 446.56,184.62 arc-90 446.71,184.77 446.91,184.77 arc90 447.06,184.92 447.06,184.93 arc90 446.91,185.08 446.71,185.08 arc-90 446.56,185.23 446.56,185.24 arc-90 446.71,185.39 446.91,185.39 arc90 447.06,185.54 447.06,185.62 446.65,186.04 445.27,186.04 J1.D-
USB1_P  (via drill 0.3)
  TOP 0.152: U1.57 432.54,170.66 432.59,170.62 432.59,169.79 433.16,169.22 434.01,169.22 v434.01,168.94
  BOTTOM 0.152: v434.01,168.94 434.01,169.22 434.71,169.22 435.18,169.69 435.18,180.13 436.76,181.72 446.14,181.72 447.37,182.95 447.37,185.74 446.77,186.34 445.27,186.34 J1.D+
USB2_N  (via drill 0.3)
  TOP 0.152: U1.59 431.74,170.71 431.7,170.67 431.7,169.04 v431.97,169.04
  BOTTOM 0.152: J2.D- 428.17,185.2 428.93,185.96 429.46,185.96 arc-90 429.62,185.81 429.62,185.32 arc90 429.77,185.17 429.78,185.17 arc90 429.93,185.32 429.93,185.81 arc-90 430.08,185.96 430.09,185.96 arc-90 430.24,185.81 430.24,185.32 arc90 430.39,185.17 430.4,185.17 arc90 430.55,185.32 430.55,185.81 arc-90 430.71,185.96 431.05,185.96 432.08,184.93 432.08,169.15 v431.97,169.04 431.7,169.04
USB2_P  (via drill 0.3)
  TOP 0.152: U1.60 431.34,170.72 431.39,170.67 431.39,169.04 v431.12,169.04
  BOTTOM 0.152: J2.D+ 428.01,187.18 428.93,186.26 431.18,186.26 432.38,185.06 432.38,169.46 432.56,169.28 432.56,168.8 432.21,168.46 431.83,168.46 431.82,168.46 431.57,168.46 431.39,168.64 431.39,169.04 v431.12,169.04
VBUS1  (via drill 0.3)
  TOP 0.203: U1.54 433.74,172.66 v434.16,173.08
  SUPPLY 0.203: v434.16,173.08 434.16,182.56 436.8,185.2 J1.VBUS
VBUS2  (via drill 0.3)
  TOP 0.203: U1.58 432.14,169.77 432.83,169.08 432.83,168.42 432.51,168.1 428.47,168.1 v427.33,169.25
  SUPPLY 0.203: v427.33,169.25 421.64,174.94 421.64,182.81 424.03,185.2 J2.VBUS
VCC3V3  (via drill 0.3, 0.35)
  TOP 0.152: U1.2 425.74,156.1 425.91,155.94 425.91,154.99 C1.1 | U1.16 431.34,155.02 C2.1 | U1.37 C3.1 | U1.46 439.69,167.72 C4.1 | U1.62 C5.1 | U1.86 420.54,165.32 C6.1 | R2.2 440.81,155.56 v439.37,155.56 | U1.55 433.34,173.15 433.95,173.76 C11.1
  TOP 0.254: C5.1 430.54,176.5 v430.73,176.69 | v433.35,177.78 433.95,177.18 C11.1
  TOP 0.305: C3.1 v439.79,165.84 C4.1 | C6.1 420.44,165.33 v420.44,163.84 | C1.1 424.5,154.97 v424.48,155 | C2.1 429.83,154.97 v429.8,155
  SUPPLY 0.254: v430.73,176.69 431.82,177.78 v433.35,177.78
  SUPPLY 0.305: 447.27,176.99 447.24,176.97 441.17,176.97 439.79,175.59 v439.79,165.84 439.79,163.25 | 439.79,163.25 439.79,155.98 v439.37,155.56 434.31,155.56 433.75,155 v429.8,155 v424.48,155 421.79,155 420.44,156.34 v420.44,163.84 423.14,166.53 427.3,166.53 430.55,169.78 430.55,176.51 v430.73,176.69 | JP1.4 439.9,163.14 439.79,163.25